# EAGLE board Knitter-Switch (EAGLE 3.55)

No outline drawn. Coordinates in mm, seen from the top.
Copper layers used: 

## Footprints (pad centres in the part's own frame; a part is rotated, then mirrored left to right if it is on the bottom)
2 = drill 1.016 pad 1.676 round:  -2.54,0;  2.54,0;  -2.54,2.54;  2.54,2.54;  -2.54,-2.54;  2.54,-2.54
E1 = drill 1.016 pad 1.676 round:  0,0;  0,2.54;  0,-2.54
E1RA = drill 1.016 pad 1.676 round:  0,5.08;  -2.54,5.08;  2.54,5.08;  -2.54,-2.54;  2.54,-2.54
E2 = drill 1.016 pad 1.676 round:  -1.27,0;  1.27,0;  -1.27,2.54;  1.27,2.54;  -1.27,-2.54;  1.27,-2.54
E2RA = drill 1.016 pad 1.676 round:  0,5.08;  -2.54,5.08;  2.54,5.08;  -2.54,-2.54;  2.54,-2.54;  -2.54,7.62;  0,7.62;  2.54,7.62
E1VM = drill 1.016 pad 1.676 round:  -1.27,8.89;  -1.27,11.43;  -1.27,13.97;  1.23,1.31;  -1.27,1.27
E2VM = drill 1.016 pad 1.676 round:  -1.27,8.89;  -1.27,11.43;  -1.27,13.97;  1.23,1.31;  -1.27,1.27;  1.27,13.97;  1.27,11.43;  1.27,8.89
S113PC = drill 1.676 pad 5.08 long:  0,-4.613;  0,0;  0,4.713
P1 = drill 1.016 pad 1.676 round:  1.27,2.54;  1.27,0;  1.27,-2.54;  -1.27,2.54;  -1.27,-2.54
P1RA = drill 1.016 pad 1.676 round:  -2.54,8.89;  0,6.35;  2.54,8.89;  2.54,6.35;  -2.54,6.35
P2 = drill 1.016 pad 1.676 round:  1.27,2.54;  1.27,0;  1.27,-2.54;  -1.27,2.54;  -1.27,-2.54;  -1.27,0
P2RA = drill 1.016 pad 1.676 round:  -2.54,8.89;  0,6.35;  2.54,8.89;  2.54,6.35;  -2.54,6.35;  0,8.89
T1 = drill 1.016 pad 1.676 round:  1.27,2.54;  1.27,0;  1.27,-2.54;  -1.27,2.54;  -1.27,-2.54
T1RA = drill 1.016 pad 1.676 round:  -2.54,7.62;  0,5.08;  2.54,7.62;  2.54,5.08;  -2.54,5.08
T2 = drill 1.016 pad 1.676 round:  1.27,2.54;  1.27,0;  1.27,-2.54;  -1.27,2.54;  -1.27,-2.54;  -1.27,0
T2RA = drill 1.016 pad 1.676 round:  -2.54,7.62;  0,7.62;  2.54,7.62;  2.54,5.08;  0,5.08;  -2.54,5.08
T116PC = drill 1.676 pad 5.08 long:  0,-4.613;  0,0;  0,4.713
1 = drill 1.016 pad 1.676 round:  0,1.3;  -2.54,1.3;  2.54,1.3;  -2.54,-1.24;  2.54,-1.24
1RA = drill 1.016 pad 1.676 round:  0,3.81;  2.54,3.81;  -2.54,3.81;  -2.54,-1.27;  2.54,-1.27
1VM = drill 1.016 pad 1.676 round:  -1.27,6.35;  -1.27,8.89;  -1.27,3.81;  -1.27,-1.27;  1.27,-1.27
2RA = drill 1.016 pad 1.676 round:  0,3.81;  2.54,3.81;  -2.54,3.81;  -2.54,-1.27;  2.54,-1.27;  -2.54,6.35;  0,6.35;  2.54,6.35
2VM = drill 1.016 pad 1.676 round:  -1.27,6.35;  -1.27,8.89;  -1.27,3.81;  -1.27,-1.27;  1.27,-1.27;  1.27,3.81;  1.27,6.35;  1.27,8.89
P112RA = drill 1.27 pad 1.93 round:  -2.54,3.81;  2.54,3.81;  0,-6.35;  0,-8.89
P113PC = drill 1.676 pad 2.54 round:  0,-2.54;  0,2.54;  -2.54,0;  2.54,0
M106RA = drill 1.422 pad 2.54 round:  4.68,12.7;  -4.68,12.673;  0,12.7 | drill 1.6 pad 2.54 round:  2.54,0;  -2.54,0
M106VM = drill 1.676 pad 3.81 long:  0,12.7;  0,15.24;  0,17.78 | drill 1.6 pad 2.54 round:  2.54,0;  -2.54,0
M206RA = drill 1.422 pad 2.54 round:  4.68,12.7;  -4.68,12.8;  0,12.7;  -4.68,16.483;  0,16.51;  4.68,16.51 | drill 1.6 pad 2.54 round:  2.54,0;  -2.54,0
M206VM = drill 1.676 pad 3.81 long:  -2.54,15.24;  -2.54,17.78;  2.54,12.7;  2.54,15.24;  2.54,17.78;  -2.54,12.7 | drill 1.6 pad 2.54 round:  2.54,0;  -2.54,0
L1 = drill 1.27 pad 2.54 round:  -2.5,6.25;  2.5,6.25;  -2.5,-6.25;  2.5,-6.25 | drill 0.813 pad 1.422 round:  -5.08,3.81;  5.08,-3.81 | hole 1.8: -4.5,0
1/10,0 = drill 0.813 pad 1.422 round:  0,2.54;  -2.54,2.54;  2.54,2.54;  -2.54,-2.54;  2.54,-2.54
1/12,6 = drill 0.813 pad 1.422 round:  0,2.54;  -2.54,2.54;  2.54,2.54;  -2.54,-2.54;  2.54,-2.54
1/15,1 = drill 0.813 pad 1.422 round:  0,2.56;  -2.54,2.56;  2.54,2.56;  -2.54,-2.52;  2.54,-2.52
3 = drill 0.813 pad 1.422 round:  0,2.56;  -2.54,2.56;  2.54,2.56;  -2.54,-2.52;  2.54,-2.52;  -2.54,5.08;  -5.08,5.08

## Placement (x,y rotation side)
AP2  [2]  116.84,149.86 0 top
APE1  [E1]  72.39,149.86 0 top
APE1RA  [E1RA]  91.44,148.59 0 top
APE2  [E2]  80.01,149.86 0 top
APE2RA  [E2RA]  104.14,148.59 0 top
ATE1  [E1]  16.51,204.47 0 top
ATE1RA  [E1RA]  36.83,204.47 0 top
ATE1VM  [E1VM]  77.47,199.39 0 top
ATE2  [E2]  25.4,204.47 0 top
ATE2RA  [E2RA]  50.8,204.47 0 top
ATE2VM  [E2VM]  88.9,199.39 0 top
EPS113PC  [S113PC]  129.54,173.99 0 top
ESP1  [P1]  16.51,149.86 0 top
ESP1RA  [P1RA]  36.83,147.32 0 top
ESP2  [P2]  25.4,149.86 0 top
ESP2RA  [P2RA]  49.53,147.32 0 top
EST1  [T1]  110.49,203.2 0 top
EST1RA  [T1RA]  130.81,201.93 0 top
EST2  [T2]  119.38,203.2 0 top
EST2RA  [T2RA]  143.51,201.93 0 top
EST116PC  [T116PC]  85.09,236.22 0 top
FP1  [1]  36.83,119.38 90 top
FP1RA  [1RA]  17.78,119.38 0 top
FP1VM  [1VM]  53.34,119.38 0 top
FP2  [2]  44.45,119.38 90 top
FP2RA  [2RA]  27.94,119.38 0 top
FP2VM  [2VM]  62.23,119.38 0 top
FT1  [1]  36.83,173.99 0 top
FT1RA  [1RA]  16.51,175.26 0 top
FT1VM  [1VM]  55.88,173.99 0 top
FT2  [2]  45.72,173.99 0 top
FT2RA  [2RA]  26.67,175.26 0 top
FT2VM  [2VM]  64.77,175.26 0 top
MSP112RA  [P112RA]  88.9,173.99 180 top
MSP113PC  [P113PC]  101.6,172.72 0 top
STM106RA  [M106RA]  16.51,231.14 0 top
STM106VM  [M106VM]  50.8,231.14 0 top
STM206RA  [M206RA]  34.29,231.14 0 top
STM206VM  [M206VM]  67.31,231.14 0 top
TME1  [E1]  82.55,119.38 0 top
TML1  [L1]  95.25,119.38 0 top
TQFP1  [-35SC]  0,0 0 top
TR1/10.0  [1/10,0]  121.92,119.38 0 top
TR1/12.6  [1/12,6]  135.89,119.38 0 top
TR1/15.1  [1/15,1]  152.4,119.38 0 top
TR2  [2]  109.22,119.38 0 top
TR3  [3]  170.18,119.38 0 top

## Library data of the parts
AP2 APE1 APE1RA APE2 APE2RA ATE1 ATE1RA ATE1VM ATE2 ATE2RA ATE2VM EPS113PC ESP1 ESP1RA ESP2 ESP2RA EST1 EST1RA EST2 EST2RA EST116PC FP1 FP1RA FP1VM FP2 FP2RA FP2VM FT1 FT1RA FT1VM FT2 FT2RA FT2VM MSP112RA MSP113PC STM106RA STM106VM STM206RA STM206VM TME1 TML1 TR1/10.0 TR1/12.6 TR1/15.1 TR2 TR3 = knitter-
TQFP1 = BLATT